# Altium PCB Led Strip 5050 parrallel.PcbDoc
Units mm, origin at the board's own origin, x right, y up, seen from the top; angles counter-clockwise.
Board outline 300 x 100 mm, 4 copper layers (Top Layer, Internal Plane 1, Internal Plane 2, Bottom Layer), stack 0.462 mm thick; 52 components, 41 nets, 260 pads, 3 vias.
Unrouted connection lines stored in the file: 65.
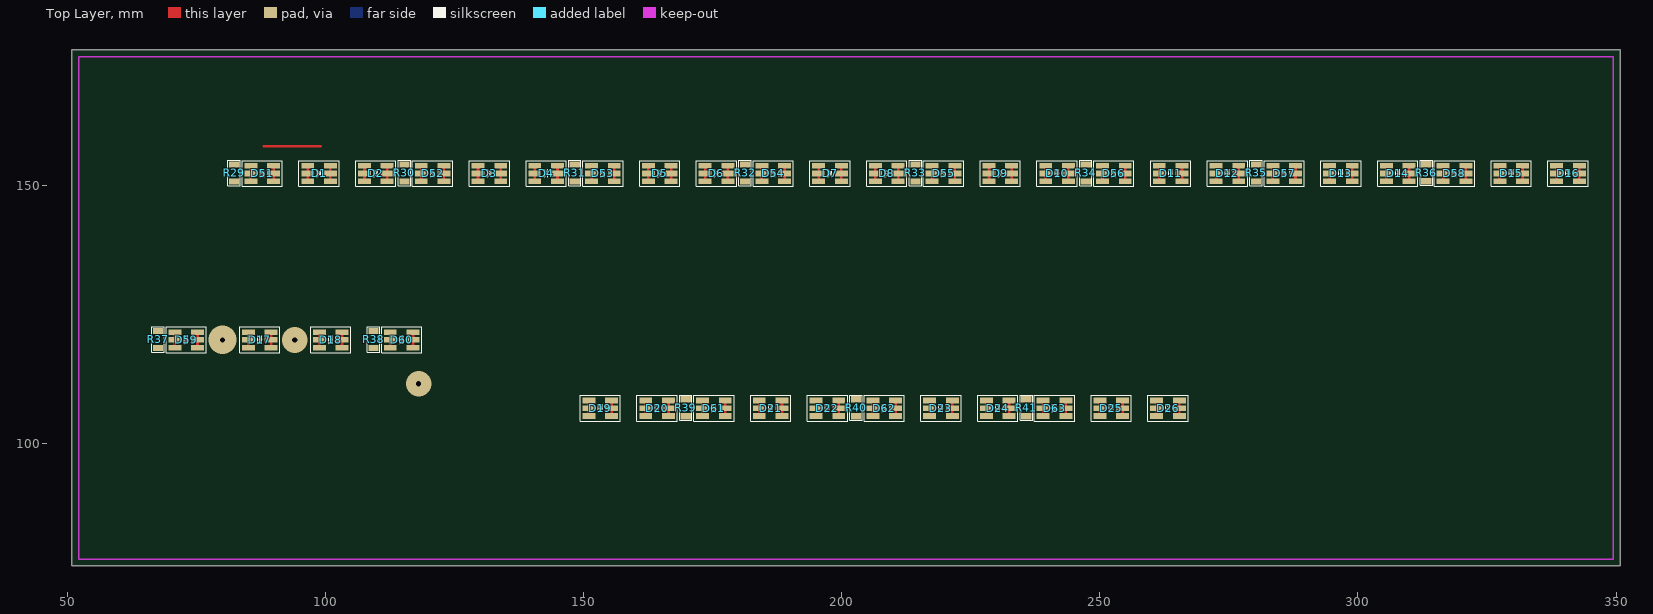
[diagram p0: Top Layer view]
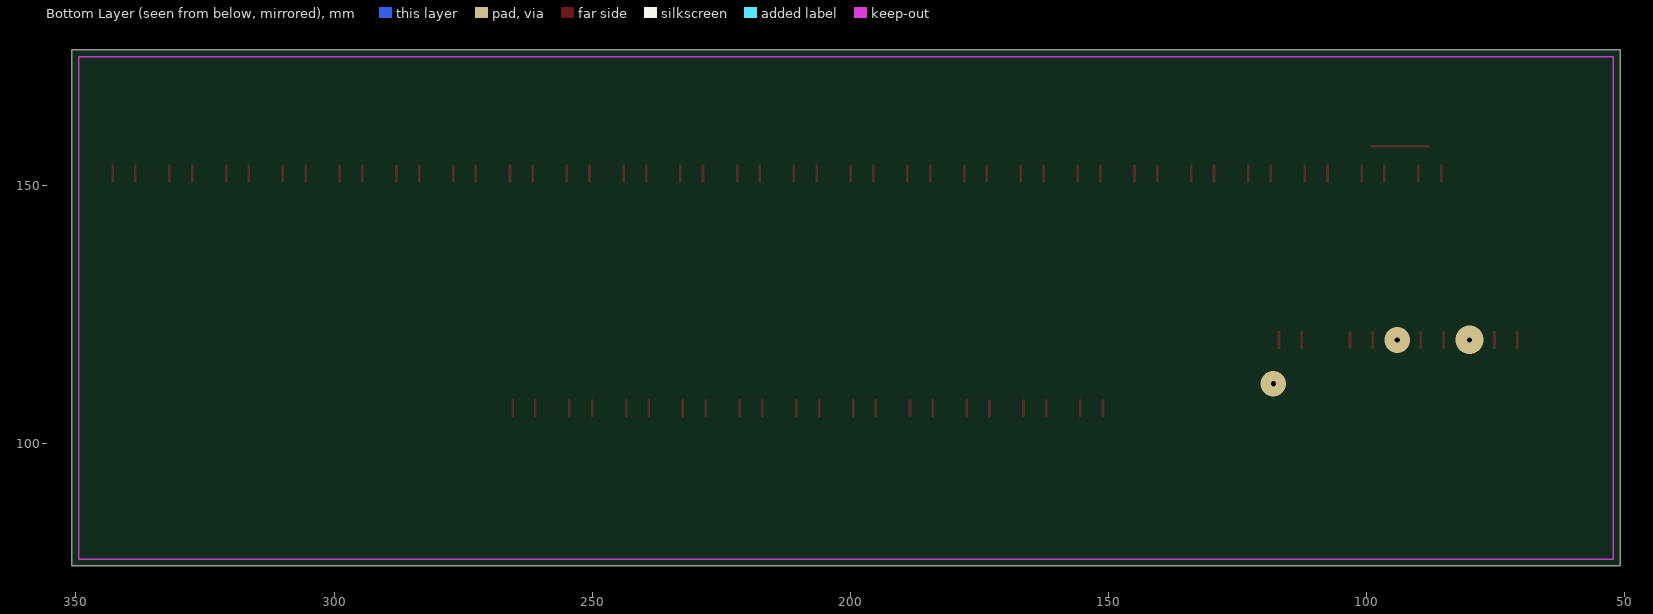
[diagram p1: Bottom Layer view, seen from below]
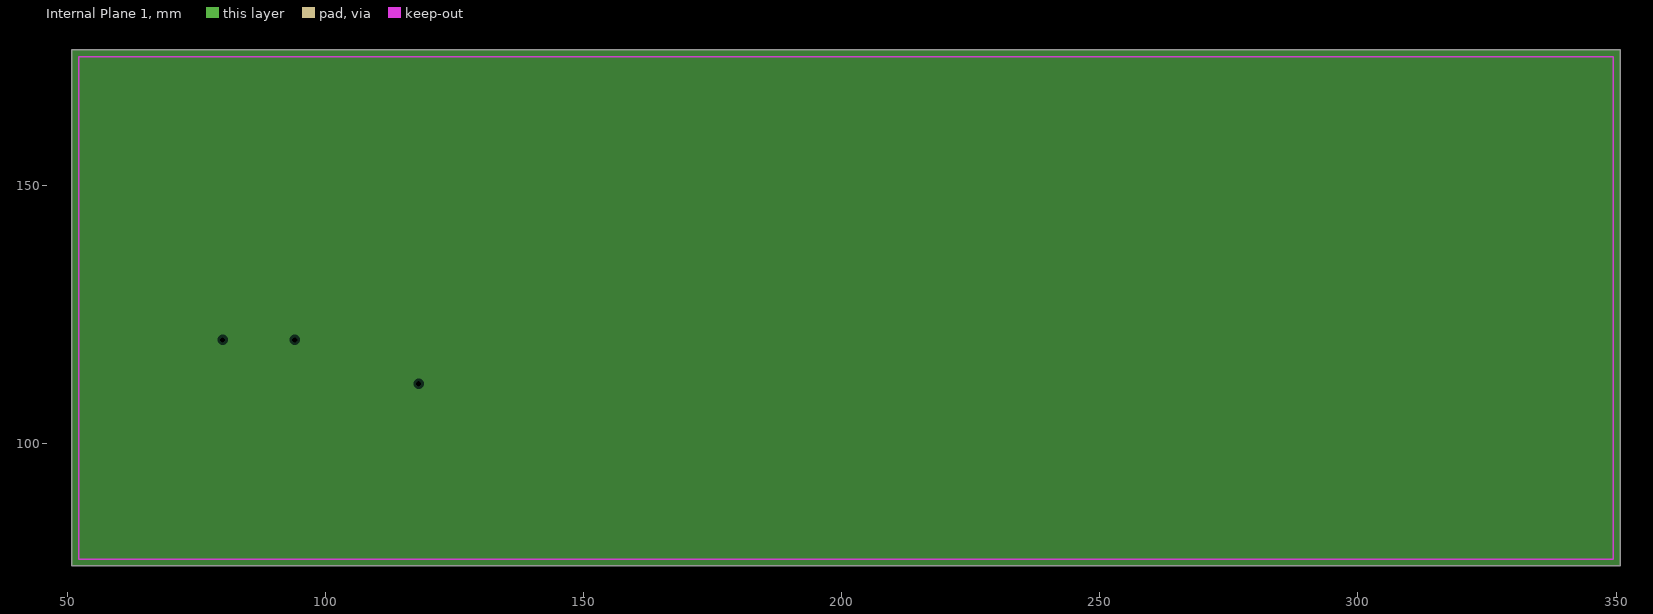
[diagram p2: Internal Plane 1, clearances drawn from the general rule]
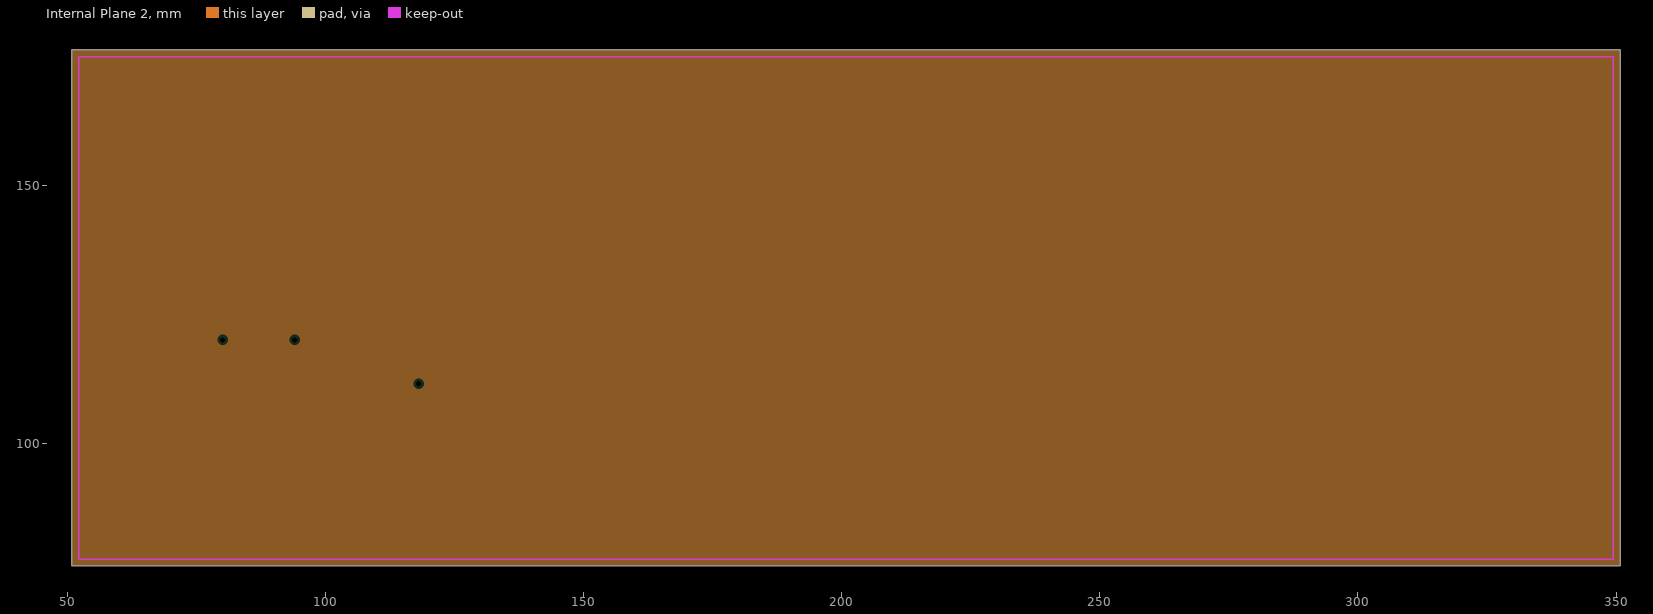
[diagram p3: Internal Plane 2, clearances drawn from the general rule]
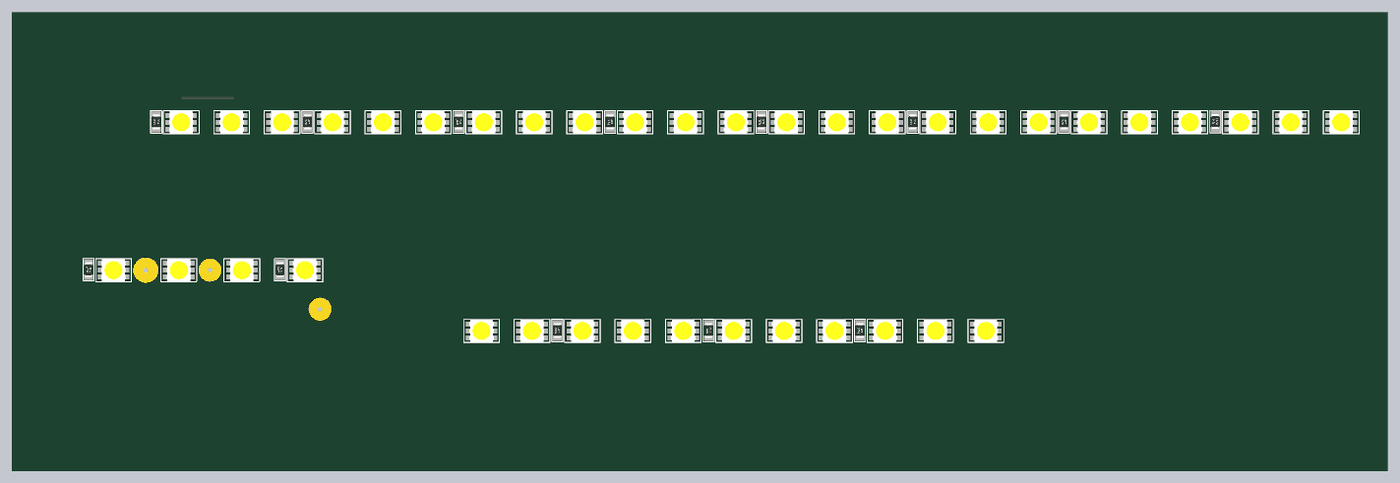
[diagram p4: 3D render of the assembled board from above, using the file's embedded part models]

## Layer stack, top to bottom
Top Solder: solder mask 0.0102, Solder Resist, Dk 3.5
Top Layer: signal copper 0.0356
Internal Plane 1: plane copper 0.0356
Internal Plane 2: plane copper 0.0356
Dielectric 1: dielectric 0.32, FR-4, Dk 4.8
Bottom Layer: signal copper 0.0356
Bottom Solder: solder mask 0.0102, Solder Resist, Dk 3.5

## Board outline
50.8,76.2 350.8,76.2 350.8,176.2 50.8,176.2

## Design rules (kind name [scope] priority, off if disabled: settings)
Clearance [All] p1: gap=0.5
PlaneClearance [All] p1: clearance=0.508
PlaneConnect [All] p1: planeconnectstyle=Relief reliefexpansion=0.508 reliefentries=4 reliefconductorwidth=0.254 reliefairgap=0.254
PolygonConnect [All] p1: connectstyle=Relief reliefconductorwidth=0.254 reliefentries=4 polygonreliefangle="90 Angle" airgapwidth=0.254
RoutingVias [All] p1: holewidth=0.6 width=1 viastyle="Through Hole" minholewidth=0.711 minwidth=1.27 maxholewidth=0.711 maxwidth=1.27
SolderMaskExpansion [All] p1: expansion=0.102
Width [All] p1: maxlimit=0.5 minlimit=0.5 preferedwidth=0.5
27 further rules are at their usual default settings.

## Components (designator, comment, footprint, x,y, rotation, side; value= is the part's Value field where it differs from the comment)
D1 "Cold White" "LED SMD 5050 White compact Parrl" 96.5,153.75 r0 top
D2 "Cold White" "LED SMD 5050 White compact Parrl" 107.5,153.75 r0 top
D3 "Cold White" "LED SMD 5050 White compact Parrl" 129.5,153.75 r0 top
D4 "Cold White" "LED SMD 5050 White compact Parrl" 140.5,153.75 r0 top
D5 "Cold White" "LED SMD 5050 White compact Parrl" 162.5,153.75 r0 top
D6 "Cold White" "LED SMD 5050 White compact Parrl" 173.5,153.75 r0 top
D7 "Cold White" "LED SMD 5050 White compact Parrl" 195.5,153.75 r0 top
D8 "Cold White" "LED SMD 5050 White compact Parrl" 206.5,153.75 r0 top
D9 "Cold White" "LED SMD 5050 White compact Parrl" 228.5,153.75 r0 top
D10 "Cold White" "LED SMD 5050 White compact Parrl" 239.5,153.75 r0 top
D11 "Cold White" "LED SMD 5050 White compact Parrl" 261.5,153.75 r0 top
D12 "Cold White" "LED SMD 5050 White compact Parrl" 272.5,153.75 r0 top
D13 "Cold White" "LED SMD 5050 White compact Parrl" 294.5,153.75 r0 top
D14 "Cold White" "LED SMD 5050 White compact Parrl" 305.5,153.75 r0 top
D15 "Cold White" "LED SMD 5050 White compact Parrl" 327.5,153.75 r0 top
D16 "Cold White" "LED SMD 5050 White compact Parrl" 338.5,153.75 r0 top
D17 "Cold White" "LED SMD 5050 White compact Parrl" 85,121.5 r0 top
D18 "Cold White" "LED SMD 5050 White compact Parrl" 98.75,121.5 r0 top
D19 "Cold White" "LED SMD 5050 White compact Parrl" 151,108.25 r0 top
D20 "Cold White" "LED SMD 5050 White compact Parrl" 162,108.25 r0 top
D21 "Cold White" "LED SMD 5050 White compact Parrl" 184,108.25 r0 top
D22 "Cold White" "LED SMD 5050 White compact Parrl" 195,108.25 r0 top
D23 "Cold White" "LED SMD 5050 White compact Parrl" 217,108.25 r0 top
D24 "Cold White" "LED SMD 5050 White compact Parrl" 228,108.25 r0 top
D25 "Cold White" "LED SMD 5050 White compact Parrl" 250,108.25 r0 top
D26 "Cold White" "LED SMD 5050 White compact Parrl" 261,108.25 r0 top
D51 "Cold White" "LED SMD 5050 White compact Parrl" 85.5,153.75 r0 top
D52 "Cold White" "LED SMD 5050 White compact Parrl" 118.5,153.75 r0 top
D53 "Cold White" "LED SMD 5050 White compact Parrl" 151.5,153.75 r0 top
D54 "Cold White" "LED SMD 5050 White compact Parrl" 184.5,153.75 r0 top
D55 "Cold White" "LED SMD 5050 White compact Parrl" 217.5,153.75 r0 top
D56 "Cold White" "LED SMD 5050 White compact Parrl" 250.5,153.75 r0 top
D57 "Cold White" "LED SMD 5050 White compact Parrl" 283.5,153.75 r0 top
D58 "Cold White" "LED SMD 5050 White compact Parrl" 316.5,153.75 r0 top
D59 "Cold White" "LED SMD 5050 White compact Parrl" 70.75,121.5 r0 top
D60 "Cold White" "LED SMD 5050 White compact Parrl" 112.5,121.5 r0 top
D61 "Cold White" "LED SMD 5050 White compact Parrl" 173,108.25 r0 top
D62 "Cold White" "LED SMD 5050 White compact Parrl" 206,108.25 r0 top
D63 "Cold White" "LED SMD 5050 White compact Parrl" 239,108.25 r0 top
R29 "Om" "SMD 1206 (3216)" 82.25,154 r270 top
R30 "Om" "SMD 1206 (3216)" 115.25,154 r270 top
R31 "Om" "SMD 1206 (3216)" 148.25,154 r270 top
R32 "Om" "SMD 1206 (3216)" 181.25,154 r270 top
R33 "Om" "SMD 1206 (3216)" 214.25,154 r270 top
R34 "Om" "SMD 1206 (3216)" 247.25,154 r270 top
R35 "Om" "SMD 1206 (3216)" 280.25,154 r270 top
R36 "Om" "SMD 1206 (3216)" 313.25,150.75 r90 top
R37 "Om" "SMD 1206 (3216)" 67.5,121.75 r270 top
R38 "Om" "SMD 1206 (3216)" 109.25,121.75 r270 top
R39 "Om" "SMD 1206 (3216)" 169.75,108.5 r270 top
R40 "Om" "SMD 1206 (3216)" 202.75,108.5 r270 top
R41 "Om" "SMD 1206 (3216)" 235.75,108.5 r270 top

## Footprints (in the part's own frame and the unit in brackets; to place one, negate y for a bottom-side part, rotate by r counter-clockwise, add the part's x,y. Pads: shape width x height; smd on the part's side, far side on the other; paste and mask are expansions set on the pad)
"LED SMD 5050 White compact Parrl" [mm]
  rect 2.5x1.1 smd: A(0,-3) A(0,-1.5) A(0,0) K(4.4,-3) K(4.4,-1.5) K(4.4,0)
  Top Layer lines w0.5: 0,-3 0,0 ; 4.4,-3 4.4,0
  silkscreen extent -1.7,-4 6.1,1, body extent -0.45,-4 4.85,1, height 1.6
"SMD 1206 (3216)" [mm]
  rect 1.2x2 smd: 1(0,0) 2(3.3,0)
  silkscreen extent -0.8,-1.2 4.1,1.2, body extent 0.05,-0.8 3.25,0.8, height 0.55

## Part data
D1 D2 D3 D4 D5 D6 D7 D8 D9 D10 D11 D12 D13 D14 D15 D16 D17 D18 D19 D20 D21 D22 D23 D24 D25 D26 D51 D52 D53 D54 D55 D56 D57 D58 D59 D60 D61 D62 D63: library part "Led SMD White Cold", "?3v ?20mA"
R29 R30 R31 R32 R33 R34 R35 R36 R37 R38 R39 R40 R41: library part "Res SMD 1206"

## Via types
v1: diameter 5, hole 1, Top Layer to Bottom Layer, 2 vias
v2: diameter 5.5, hole 1, Top Layer to Bottom Layer, 1 vias

## Nets (pads, with @x,y where several pads share a name; then routed paths per layer and width w, separated by ;. In a path a pad name is that pad's centre, name@x,y a point inside that pad or via, vN(x,y) a via of type N, cw(c..) or ccw(c..) an arc to the next point about the centre after c; other vN are vias at no path point)
GND: D2.K D4.K D6.K D8.K D10.K D12.K D14.K D16.K D18.K D20.K D22.K D24.K D26.K
NetD1_A: D1.A D51.K
NetD1_K: D1.K D2.A
NetD3_A: D3.A D52.K
NetD3_K: D3.K D4.A
NetD5_A: D5.A D53.K
NetD5_K: D5.K D6.A
NetD7_A: D7.A D54.K
NetD7_K: D7.K D8.A
NetD9_A: D9.A D55.K
NetD9_K: D9.K D10.A
NetD11_A: D11.A D56.K
NetD11_K: D11.K D12.A
NetD13_A: D13.A D57.K
NetD13_K: D13.K D14.A
NetD15_A: D15.A D58.K
NetD15_K: D15.K D16.A
NetD17_A: D17.A D59.K
  other v2: 80,120
NetD17_K: D17.K D18.A
  other v1: 94,120
NetD19_A: D19.A D60.K
NetD19_K: D19.K D20.A
NetD21_A: D21.A D61.K
NetD21_K: D21.K D22.A
NetD23_A: D23.A D62.K
NetD23_K: D23.K D24.A
NetD25_A: D25.A D63.K
NetD25_K: D25.K D26.A
NetD51_A: D51.A R29.2
NetD52_A: D52.A R30.2
NetD53_A: D53.A R31.2
NetD54_A: D54.A R32.2
NetD55_A: D55.A R33.2
NetD56_A: D56.A R34.2
NetD57_A: D57.A R35.2
NetD58_A: D58.A R36.2
NetD59_A: D59.A R37.2
NetD60_A: D60.A R38.2
NetD61_A: D61.A R39.2
NetD62_A: D62.A R40.2
NetD63_A: D63.A R41.2
VCC: R29.1 R30.1 R31.1 R32.1 R33.1 R34.1 R35.1 R36.1 R37.1 R38.1 R39.1 R40.1 R41.1
copper on no net: | length 11
  Top Layer w0.5: 88,157.5 99,157.5
  other v1: 118,111.5

## Keep-outs
Keep-Out Layer:
  lines w0.3: 52.1,77.5 52.1,174.9 349.5,174.9 349.5,77.5 52.1,77.5

## Dimensions
52.1,77.5 to 52.1,174.9 on Mechanical 1
52.1,77.5 to 349.5,77.5 on Mechanical 1